# Altium PCB Adapter_UARTSPI_RS485.PcbDoc
Units mil, origin at the board's own origin, x right, y up, seen from the top; angles counter-clockwise.
Board outline 2487.05 x 1378.58 mil, 4 copper layers (Top, Mid-Layer 1, Mid-Layer 14, Bottom), stack 60.238 mil thick; 46 components, 33 nets, 135 pads, 27 vias.
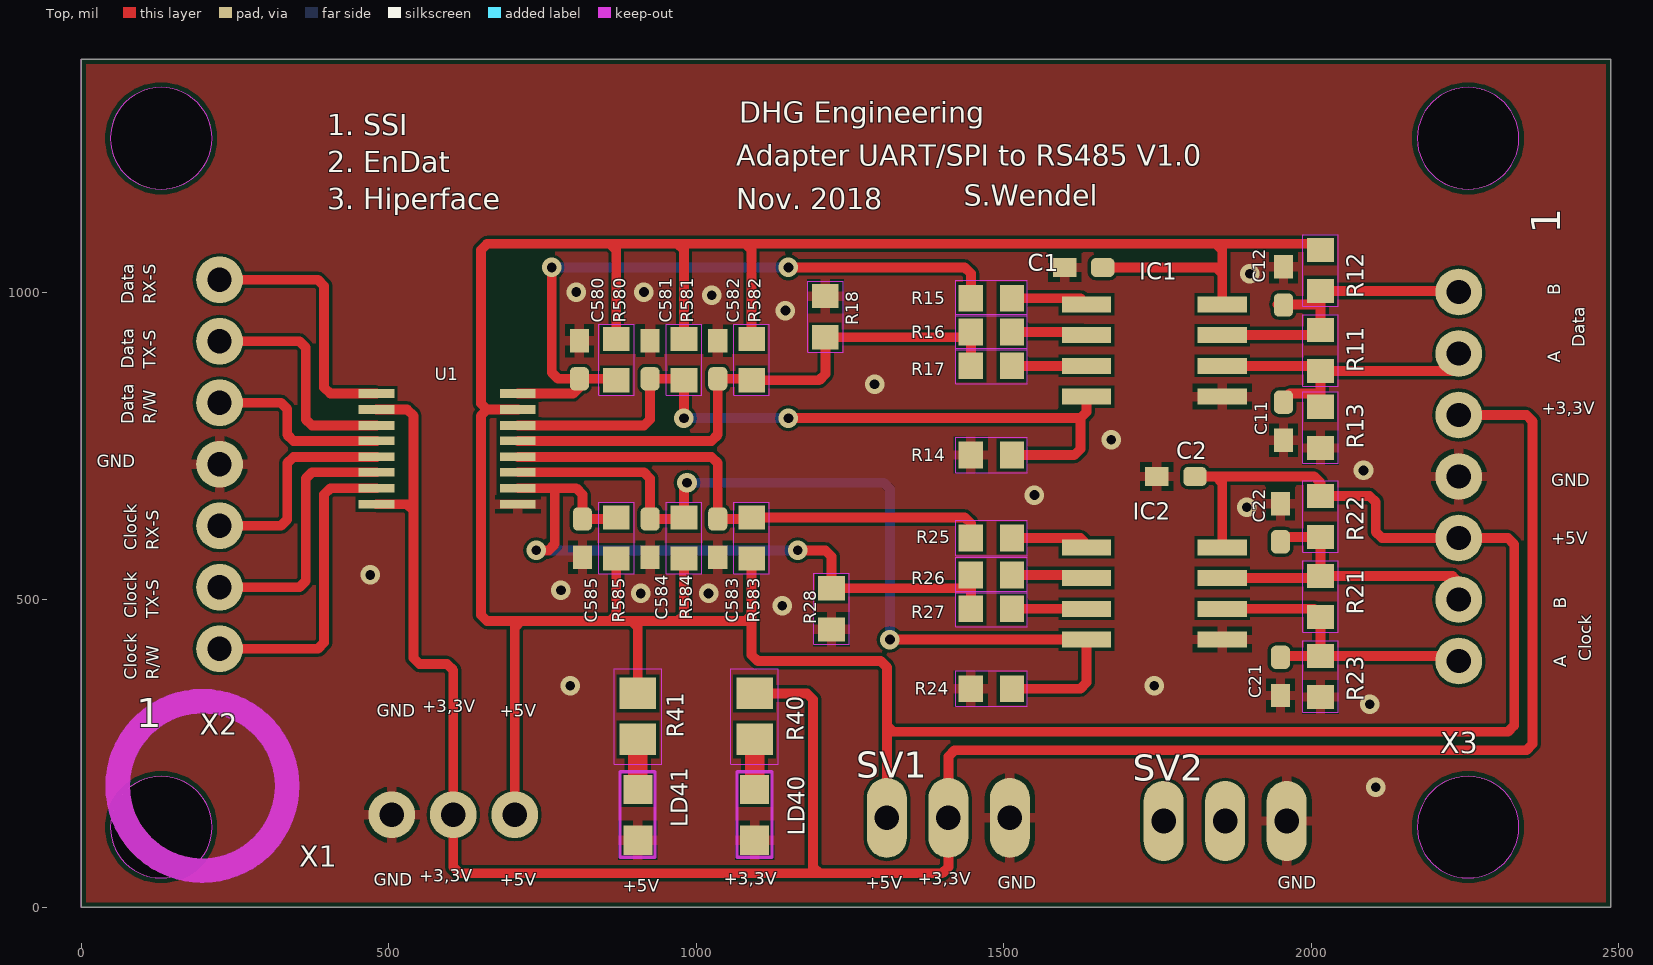
[diagram p0: Top view]
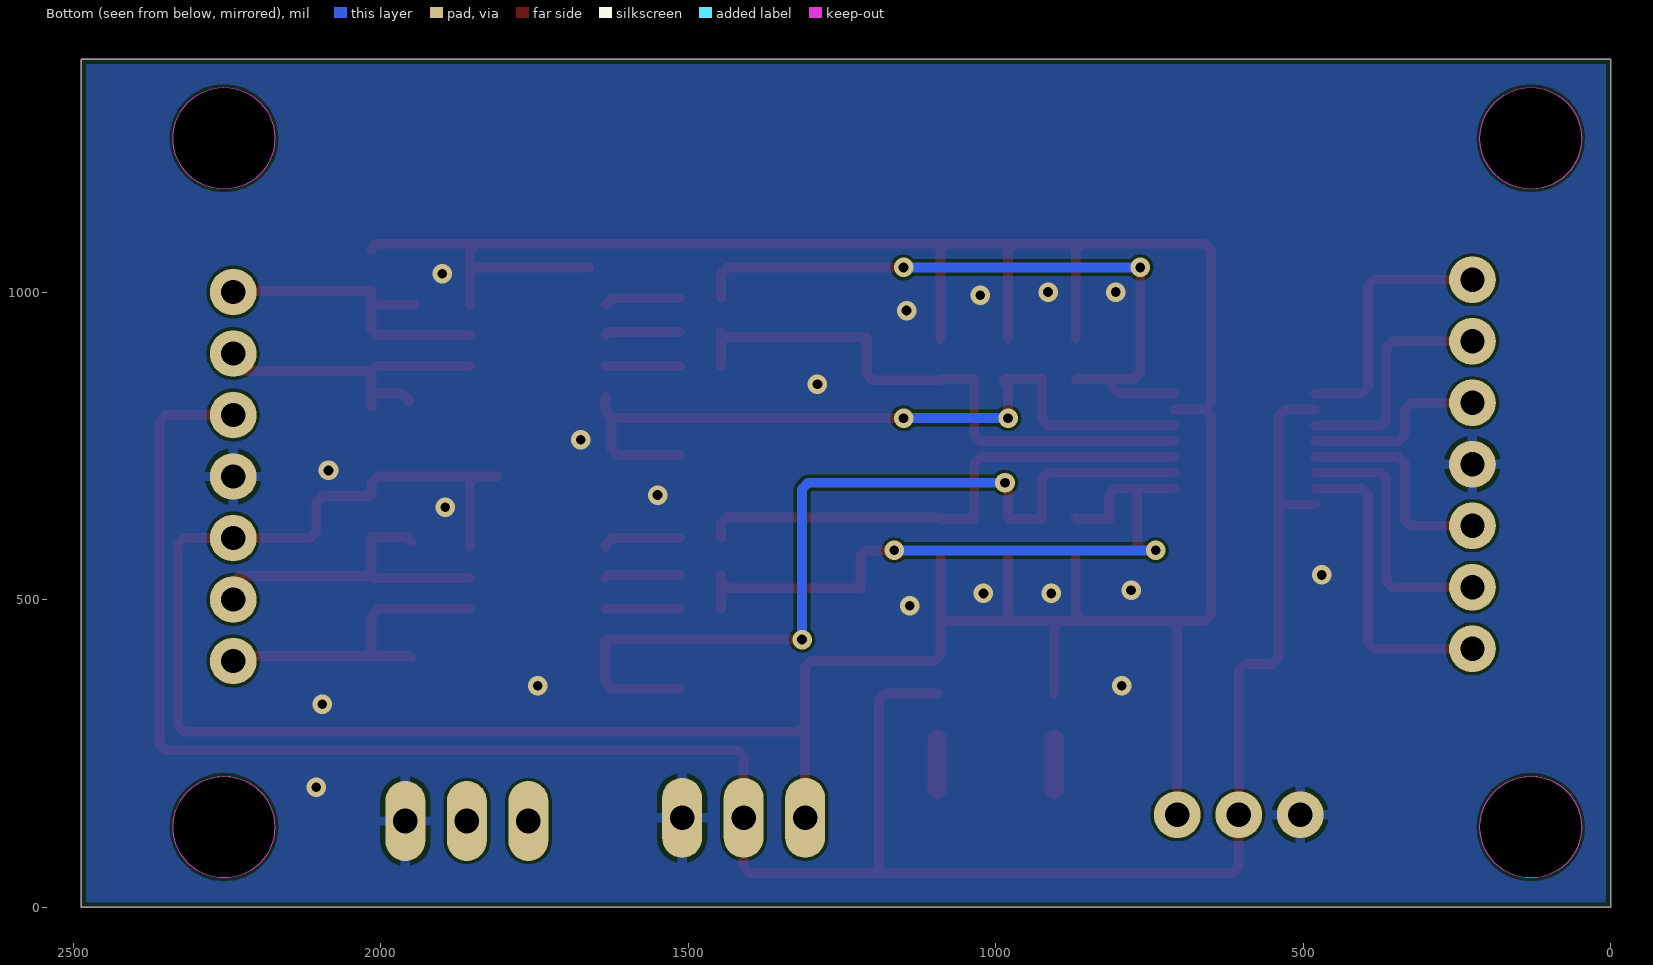
[diagram p1: Bottom view, seen from below]

## Layer stack, top to bottom
Top Solder: solder mask 0.4, Solder Resist, Dk 3.5
Top: signal copper 1.378
Dielectric 1: dielectric 12.6, FR-4, Dk 4.8
Mid-Layer 1: signal copper 1.378
Dielectric 2: core 14.1732, FR-4, Dk 4.8
Mid-Layer 14: signal copper 1.378
Dielectric 3: prepreg 27.9528, FR-4, Dk 4.8
Bottom: signal copper 1.378
Bottom Solder: solder mask 0.4, Solder Resist, Dk 3.5

## Board outline
0,1378.58 0,0 2487.05,0 2487.05,1378.58
cut-out: 130,1167.33 ccw(c130,1250) 212.68,1250 ccw(c130,1250) 130,1332.67 ccw(c130,1250) 47.33,1250 ccw(c130,1250)
cut-out: 2255,47.33 ccw(c2255,130) 2337.68,130 ccw(c2255,130) 2255,212.68 ccw(c2255,130) 2172.32,130 ccw(c2255,130)
cut-out: 130,47.33 ccw(c130,130) 212.68,130 ccw(c130,130) 130,212.68 ccw(c130,130) 47.33,130 ccw(c130,130)
cut-out: 2255,1167.33 ccw(c2255,1250) 2337.68,1250 ccw(c2255,1250) 2255,1332.67 ccw(c2255,1250) 2172.32,1250 ccw(c2255,1250)

## Design rules (kind name [scope] priority, off if disabled: settings)
BoardOutlineClearance mdCopperDimension [All] p1: gap=10 ignorepadtopadclearanceinfootprint=FALSE except(0: Arc-SplitContinuation Track-SplitContinuation SMDPad-SplitContinuation THPad-SplitContinuation Via-SplitContinuation Fill-SplitContinuation Poly-SplitContinuation Region-SplitContinuation Text-SplitContinuation; 7.87: Poly-OutlineEdge Poly-CavityEdge Poly-CutoutEdge Poly-SplitBarrior)
Clearance "Clearance (Same Net)" [All] p1: gap=5 ignorepadtopadclearanceinfootprint=FALSE
Clearance [All] p2: gap=5 ignorepadtopadclearanceinfootprint=FALSE
HoleSize HoleSize_For_NetClass_analog_power [InNetClass('analog_power')] p1: absolutevalues=TRUE maxlimit=0 minlimit=0 maxpercent=80.000 minpercent=20.000
HoleSize HoleSize_For_NetClass_power [InNetClass('power')] p2: absolutevalues=TRUE maxlimit=0 minlimit=0 maxpercent=80.000 minpercent=20.000
HoleSize [All] p3: absolutevalues=TRUE maxlimit=100000 minlimit=7.87 maxpercent=80.000 minpercent=20.000
HoleToHoleClearance mdDrill [All] p1: gap=6 allowstackedmicrovias=TRUE
MinimumSolderMaskSliver [All] p1 off: minsoldermaskwidth=10
PasteMaskExpansion mlMinCreamFrame [All] p1: expansion=0
PolygonConnect PolygonConnect_For_PolygonThermal_ON_Width160000_Gap78740 [InPolygonClass('PolygonThermal_ON_Width160000_Gap78740') vs Not IsVia] p1: connectstyle=Relief reliefconductorwidth=16 reliefentries=4 polygonreliefangle="90 Angle" airgapwidth=7.87
PolygonConnect ThermalVias [IsVia] p2: connectstyle=Direct reliefconductorwidth=10 reliefentries=4 polygonreliefangle="90 Angle" airgapwidth=10
PolygonConnect [All] p3: connectstyle=Relief reliefconductorwidth=10 reliefentries=4 polygonreliefangle="90 Angle" airgapwidth=10
RoutingVias [All] p1: holewidth=7.87 width=23.87 viastyle="Through Hole" minholewidth=7.87 minwidth=23.87 maxholewidth=100 maxwidth=100
SolderMaskExpansion mlMinStopFrame [All] p1: expansion=2.95 istentingtop=FALSE
Width Width_For_NetClass_analog_power [InNetClass('analog_power')] p1: maxlimit=10 minlimit=9.84 preferedwidth=9.84
Width Width_For_NetClass_power [InNetClass('power')] p2: maxlimit=23.62 minlimit=10 preferedwidth=11.81
Width [All] p3: maxlimit=10000 minlimit=5.91 preferedwidth=5.91
26 further rules are at their usual default settings.

## Classes and differential pairs
polygon class PolygonThermal_ON_Width160000_Gap78740: Polygon_1_Net_GND Polygon_2_Net_GND

## Components (designator, comment, footprint, x,y, rotation, side; value= is the part's Value field where it differs from the comment)
C1 "100n" SMD-0603 1630,1040 r180 top
C2 "100n" SMD-0603 1780,700 r180 top
C11 "1n 10%" SMD-0603 1955,790 r270 top
C12 "1n 10%" SMD-0603 1955,1010 r90 top
C21 "1n 10%" SMD-0603 1950,375 r270 top
C22 "1n 10%" SMD-0603 1950,625 r90 top
C580 "1n 10%" SMD-0603 810,890 r90 top
C581 "1n 10%" SMD-0603 925,890 r90 top
C582 "1n 10%" SMD-0603 1035,890 r90 top
C583 "1n 10%" SMD-0603 1035,600 r270 top
C584 "1n 10%" SMD-0603 925,600 r270 top
C585 "1n 10%" SMD-0603 815,600 r270 top
IC1 "" SOIC8 1745,905 r270 top
IC2 "" SOIC8 1745,510 r270 top
LD40 "Red" CHIP-LED0805 1095,150 r180 top
LD41 "Yellow" CHIP-LED0805 905,150 r180 top
R11 "120R" R0603 2015,905 r270 top
R12 "1k" R0603 2015,1035 r270 top
R13 "1k" R0603 2015,780 r270 top
R14 "10k 0,1%" R0603 1480,735 r0 top
R15 "22 0,1%" R0603 1480,990 r180 top
R16 "0R" R0603 1480,935 r0 top
R17 "0R" R0603 1480,880 r0 top
R18 "10k 0,1%" R0603 1210,960 r270 top
R21 "120R" R0603 2015,505 r90 top
R22 "1k" R0603 2015,635 r270 top
R23 "1k" R0603 2015,375 r270 top
R24 "10k 0,1%" R0603 1480,355 r0 top
R25 "22 0,1%" R0603 1480,600 r180 top
R26 "0R" R0603 1480,540 r0 top
R27 "0R" R0603 1480,485 r0 top
R28 "10k 0,1%" R0603 1220,485 r90 top
R40 "1k1" R0805 1095,310 r90 top
R41 "1k1" R0805 905,310 r90 top
R580 "1k 1%" R0603 870,890 r90 top
R581 "1k 1%" R0603 980,890 r90 top
R582 "1k 1%" R0603 1090,890 r90 top
R583 "1k 1%" R0603 1090,600 r270 top
R584 "1k 1%" R0603 980,600 r270 top
R585 "1k 1%" R0603 870,600 r270 top
SV1 "" MA03-1 1410,145 r0 top
SV2 "" MA03-1 1860,140 r0 top
U1 "TXB0106PWR" SOP65P640X120-16N 595,745 r0 top
X1 "" KLEMME_3POLIG_2,54 605,150 r180 top
X2 "" KLEMME_7POLIG_2,54 225,720 r90 top
X3 "" KLEMME_7POLIG_2,54 2240,700 r270 top

## Footprints (in the part's own frame and the unit in brackets; to place one, negate y for a bottom-side part, rotate by r counter-clockwise, add the part's x,y. Pads: shape width x height; smd on the part's side, far side on the other; paste and mask are expansions set on the pad)
CHIP-LED0805 [mil] "CHIP-LED0805"
  rect 47.24x47.24 smd: A(0,-41.34) C(0,41.34)
  Top keep-out lines w5: 29,69 29,-70 -28,-70 -28,69 29,69
KLEMME_3POLIG_2,54 [mil] "KLEMME_3POLIG_2,54"
  round 76 hole 39.37: 1(-100,0) 2(0,0) 3(100,0)
KLEMME_7POLIG_2,54 [mil] "KLEMME_7POLIG_2,54"
  round 76 hole 39.37: 1(-300,0) 2(-200,0) 3(-100,0) 4(0,0) 5(100,0) 6(200,0) 7(300,0)
MA03-1 [mil] "MA03-1"
  oval 65x130 hole 40: 1(-100,0) 2(0,0) 3(100,0)
R0603 [mm] "R0603"
  rect 1x1.1 smd: 1(-0.85,0) 2(0.85,0)
  Top keep-out lines w0.051: 1.473,-0.733 -1.473,-0.733 -1.473,0.733 1.473,0.733 1.473,-0.733
R0805 [mil] "R0805"
  rect 51.18x59.06 smd: 1(-37.4,0) 2(37.4,0)
  Top keep-out lines w2: -77.68,38.7 -77.68,-38.7 77.68,-38.7 77.68,38.7 -77.68,38.7
SMD-0603 [mil] "SMD-0603"
  rrect50% 38x31 smd: 1(-31,0)
  rect 38x31 smd: 2(31,0)
SOIC8 [mil] "SOIC8"
  rect 26x80 smd: 1(-75,-110.24) 2(-25,-110.24) 3(25,-110.24) 4(75,-110.24) 5(75,110.24) 6(25,110.24) 7(-25,110.24) 8(-75,110.24)
SOP65P640X120-16N [mil] "SOP65P640X120-16N"
  rect 58x14 smd: 1(-115,90) 2(-115,64) 3(-115,38) 4(-115,13) 5(-115,-13) 6(-115,-38) 7(-115,-64) 8(-115,-90) 9(115,-90) 10(115,-64) 11(115,-38) 12(115,-13) 13(115,13) 14(115,38) 15(115,64) 16(115,90)

## Part data
C1 C2 C11 C12 C21 C22 C580 C581 C582 C583 C584 C585: library part SMD-0603, PackageName=SMD-0603
IC1 IC2: library part SOIC8, PackageName=SOIC8
LD40 LD41: library part CHIP-LED0805, PackageName=CHIP-LED0805
R11 R12 R13 R14 R15 R16 R17 R18 R21 R22 R23 R24 R25 R26 R27 R28 R580 R581 R582 R583 R584 R585: library part R0603, PackageName=R0603
R40 R41: library part R0805, PackageName=R0805
SV1 SV2: library part MA03-1, PackageName=MA03-1
U1: library part SOP65P640X120-16N, PackageName=SOP65P640X120-16N
X1: library part KLEMME_3POLIG_2,54, PackageName=KLEMME_3POLIG_2,54
X2 X3: library part KLEMME_7POLIG_2,54, PackageName=KLEMME_7POLIG_2,54

## Free pads (board coordinates)
  round 165.35 hole 165.35 unplated: MH1(130,130) MH2(2255,1250) MH3(130,1250) MH4(2255,130)

## Via types
v1: diameter 31.75/31.75/31.75/31.75 (per signal layer), hole 15.75, Top to Bottom, 27 vias

## Nets (pads, with @x,y where several pads share a name; then routed paths per layer and width w, separated by ;. In a path a pad name is that pad's centre, name@x,y a point inside that pad or via, vN(x,y) a via of type N, cw(c..) or ccw(c..) an arc to the next point about the centre after c; other vN are vias at no path point)
+3,3V: R40.2 SV1.2 U1.2 U1.8 X1.2 X3.3 | length 3902
  Top w16: U1.8 530,655 540,645 ; U1.2 530,809 540,799 540,645 ; R40.2 1180,347.4 1190,337.4 1190,65 1200,55 ; X3.3 2350,800 2360,790 2360,265 2350,255 1420,255 1410,245 SV1.2 1410,65 1400,55 1200,55 ; 540,645 540,570 540,405 550,395 595,395 605,385 X1.2 605,65 615,55 1200,55
+5V: C1.1 C2.1 IC1.8 IC2.8 R12.1 R22.1 R41.2 R580.2 R581.2 R582.2 R583.2 R584.2 R585.2 SV1.1 U1.15 X1.1 X3.5 | length 6633.8
  Top w16: X1.1 705,455 715,465 ; U1.15 660,809 ; R585.2 870,475 860,465 ; R580.2 870,1068.46 860,1078.46 ; R41.2 905,455 895,465 ; R584.2 980,475 970,465 ; R581.2 980,1068.46 970,1078.46 ; R583.2 1090,475 ; R582.2 1090,1068.46 1080,1078.46 ; SV1.1 1310,295 ; C1.1 1845.24,1040 1855.24,1030 IC1.8 1855.24,1068.46 1845.24,1078.46 ; C2.1 1845.24,700 ; IC2.8 1855.24,690 1845.24,700 ; R12.1 2010,1078.46 1845.24,1078.46 ; 660,809 650,799 650,475 660,465 715,465 ; 660,809 650,819 650,1068.46 660,1078.46 860,1078.46 ; 715,465 860,465 ; 860,465 895,465 ; 860,1078.46 970,1078.46 ; 895,465 970,465 ; 970,465 1080,465 1090,475 ; 970,1078.46 1080,1078.46 ; 1080,1078.46 1845.24,1078.46 ; 1090,475 1090,410 1100,400 1300,400 1310,390 1310,295 ; 1310,295 1320,285 2320,285 2330,295 2330,590 2320,600 X3.5 2115,600 2105,610 2105,658.46 2095,668.46 R22.1 2015,690 2005,700 1845.24,700
ERDE_2: 
GND: C1.2 C2.2 C11.2 C12.2 C21.2 C22.2 C580.2 C581.2 C582.2 C583.2 C584.2 C585.2 IC1.5 IC2.5 LD40.C LD41.C R13.2 R14.1 R18.1 R23.2 R24.1 R28.1 SV1.3 SV2.3 U1.9 X1.3 X2.4 X3.4
  other v1: 2105,195 2095,330 795,360 1745,360 1140,490 910,510 1020,510 780,515 470,540 1895,650 1550,670 2085,710 1675,760 1290,850 1145,970 1025,995 805,1000 915,1000 1900,1030
N$1: IC2.1 R25.1 | length 130.4
  Top w16: R25.1 1624.76,600 1634.76,590 IC2.1
N$2: LD41.A R41.1 | length 81.3
  Top w32: LD41.A R41.1
N$3: LD40.A R40.1 | length 81.3
  Top w32: LD40.A R40.1
N$4: 
N$5: 
N$6: 
N$8: 
N$9: 
N$10: IC1.1 R15.1 | length 125.4
  Top w16: R15.1 1624.76,990 IC1.1
R/W_CLOCK: U1.7 X2.1 | length 504.3
  Top w16: X2.1 385,420 395,430 395,671 405,681 U1.7
R/W_DATA: U1.4 X2.5 | length 305.3
  Top w16: X2.5 325,820 335,810 335,768 345,758 U1.4
READ_WRITE_CLOCK: C585.1 R26.1 R27.1 R28.2 R585.1 U1.10 | length 1166.7
  Top w5.91: C585.1 C585.1@817.54,633.46
  Top w16: U1.10 770,681 ; v1(740,580) 760,580 770,590 770,681 ; R585.1 867.54,631 C585.1 815,671 805,681 770,681 ; v1(1165,580) 1210,580 1220,570 R28.2 1436.54,518.46 1446.54,528.46 R26.1 R27.1
  Bottom w16: v1(740,580) v1(1165,580)
READ_WRITE_DATA: C582.1 R16.1 R17.1 R18.2 R582.1 U1.13 | length 958.8
  Top w5.91: C582.1 C582.1@1037.46,856.54
  Top w16: U1.13 1025,758 1035,768 C582.1 1087.54,859 R582.1 1200,856.54 1210,866.54 R18.2 1438.07,926.54 R16.1 R17.1
RS485_!RE_C: IC2.2 R26.2 | length 123.4
  Top w16: R26.2 1629.76,540 IC2.2
RS485_!RE_D: IC1.2 R16.2 | length 123.4
  Top w16: R16.2 1629.76,935 IC1.2
RS485_A_CLOCK: C21.1 IC2.6 R21.1 R23.1 X3.7 | length 524.1
  Top w16: IC2.6 2005,485 R21.1 R23.1 ; C21.1 1952.46,408.46 R23.1 ; X3.7 2231.54,408.46 R23.1
RS485_A_DATA: C11.1 IC1.6 R11.2 R13.1 X3.2 | length 537.1
  Top w16: IC1.6 2006.54,880 R11.2 ; C11.1 1955,825 1965,835 2015,835 ; R13.1 2015,835 ; X3.2 2240,881.54 2230,871.54 R11.2 ; 2015,835 R11.2
RS485_B_CLOCK: C22.1 IC2.7 R21.2 R22.2 X3.6 | length 552.4
  Top w16: IC2.7 2011.54,535 R21.2 ; C22.1 1957.54,601.54 R22.2 ; R22.2@2013.46,600 ccw(c2013.46,601.54) R22.2 ; X3.6 2240,528.46 2230,538.46 R21.2 ; R21.2 R22.2
RS485_B_DATA: C12.1 IC1.7 R11.1 R12.2 X3.1 | length 523.4
  Top w16: IC1.7 2006.54,930 R11.1 2015,980 ; C12.1@1945,980 C12.1@1954,980 ; C12.1 C12.1@1954,980 ; X3.1 2238.46,1001.54 R12.2 2015,980 ; C12.1@1954,980 2015,980
RS485_DE_C: IC2.3 R27.2 | length 121.3
  Top w16: R27.2 IC2.3
RS485_DE_D: IC1.3 R17.2 | length 121.3
  Top w16: R17.2 IC1.3
RX-S_CLOCK: C583.1 R25.2 R583.1 U1.12 | length 863.8
  Top w5.91: C583.1 C583.1@1037.46,633.46
  Top w16: U1.12 1025,732 1035,722 C583.1 1087.54,631 R583.1 1436.54,633.46 1446.54,623.46 R25.2
RX-S_DATA: C580.1 R15.2 R580.1 U1.16 | length 1125
  Top w16: U1.16 800,835 810,845 C580.1 ; v1(765,1040) 765,869 775,859 C580.1 ; R580.1 867.54,859 830,859 C580.1 ; v1(1150,1040) 1436.54,1040 1446.54,1030 R15.2
  Bottom w16: v1(765,1040) v1(1150,1040)
RX_CLOCK: U1.5 X2.3 | length 355.3
  Top w16: X2.3 325,620 335,630 335,722 345,732 U1.5
RX_DATA: U1.1 X2.7 | length 428.3
  Top w16: X2.7 385,1020 395,1010 395,845 405,835 U1.1
TX-S_CLOCK: C584.1 IC2.4 R24.2 R584.1 U1.11 | length 1494.1
  Top w16: U1.11 915,707 925,697 C584.1 977.54,631 R584.1 980,685 v1(985,690) ; v1(1315,435) IC2.4 1634.76,365 1624.76,355 R24.2
  Bottom w16: v1(985,690) 1305,690 1315,680 v1(1315,435)
TX-S_DATA: C581.1 IC1.4 R14.2 R581.1 U1.14 | length 1270.6
  Top w5.91: R581.1@977.54,859 R581.1 R581.1@987,854.54
  Top w16: U1.14 915,783 925,793 C581.1 982.54,859 R581.1@987,854.54 ; v1(980,795) R581.1 ; v1(1150,795) 1624.76,795 ; R14.2 1614.76,735 1624.76,745 1624.76,795 ; IC1.4 1634.76,805 1624.76,795
  Bottom w16: v1(980,795) v1(1150,795)
TX_CLOCK: U1.6 X2.2 | length 430.3
  Top w16: X2.2 355,520 365,530 365,697 375,707 U1.6
TX_DATA: U1.3 X2.6 | length 380.3
  Top w16: X2.6 355,920 365,910 365,793 375,783 U1.3
pads on no net: SV2.1 SV2.2

## Polygon pours and split planes (outlines as drawn)
GND on Top "Polygon_1_Net_GND" (solid, remove dead copper, pour order 1): -8,-8 2493,-8 2493,1383 -8,1383
GND on Bottom "Polygon_2_Net_GND" (solid, remove dead copper, pour order 0): -8,-8 2493,-8 2493,1383 -8,1383

## Keep-outs
Top:
  circle w40: c197,197 r137.8
Keep-Out Layer:
  the board outline again, w0

## Silkscreen, mask and mechanical layers (free items; w line width, h text height)
Top Overlay:
  text "DHG Engineering" at 1070,1275 h34
  text "1. SSI" at 400,1255 h34
  text "Adapter UART/SPI to RS485 V1.0" at 1065,1205 h34
  text "2. EnDat" at 400,1195 h34
  text "S.Wendel" at 1435,1140 h34
  text "3. Hiperface" at 400,1135 h34
  text "Nov. 2018" at 1065,1135 h34
  text "1" at 2405,1095 h47.6 r90
  text "B" at 2405,995 h20.4 r90
  text "Data" at 85,980 h20.4 r90
  text "RX-S" at 121,980 h20.4 r90
  text "Data" at 2445,910 h20.4 r90
  text "A" at 2405,885 h20.4 r90
  text "Data" at 85,875 h20.4 r90
  text "TX-S" at 121,875 h20.4 r90
  text "+3,3V" at 2374.83,801.4 h20.4
  text "Data" at 85,785 h20.4 r90
  text "R/W" at 121,785 h20.4 r90
  text "GND" at 25,715 h20.4
  text "GND" at 2390.62,684.61 h20.4
  text "+5V" at 2390.62,589.61 h20.4
  text "Clock" at 90,580 h20.4 r90
  text "RX-S" at 126,580 h20.4 r90
  text "B" at 2415,485 h20.4 r90
  text "Clock" at 90,470 h20.4 r90
  text "TX-S" at 126,470 h20.4 r90
  text "Clock" at 2455,400 h20.4 r90
  text "A" at 2415,390 h20.4 r90
  text "Clock" at 90,370 h20.4 r90
  text "R/W" at 126,370 h20.4 r90
  text "+3,3V" at 554.83,316.4 h20.4
  text "GND" at 480.62,309.61 h20.4
  text "+5V" at 680.62,309.61 h20.4
  text "1" at 89.14,292.42 h47.6
  text "+3,3V" at 549.83,41.4 h20.4
  text "+3,3V" at 1044.83,36.4 h20.4
  text "+3,3V" at 1359.83,36.4 h20.4
  text "GND" at 475.62,34.61 h20.4
  text "+5V" at 680.62,34.61 h20.4
  text "+5V" at 1275.62,29.61 h20.4
  text "GND" at 1490.62,29.61 h20.4
  text "GND" at 1945.62,29.61 h20.4
  text "+5V" at 880.62,24.61 h20.4
Dimension:
  the board outline again, w0

## Text inside footprints (layer, text, board x,y; h text height)
SV1: tPlace "1" at 1210,120 h42.5
SV2: tPlace "1" at 1660,115 h42.5
U1: tDocu "*" at 447,843 h42.5; tPlace "*" at 447,843 h42.5